# Altium PCB start.PcbDoc
Units mil, origin at the board's own origin, x right, y up, seen from the top; angles counter-clockwise.
Board outline 3650 x 1995 mil, 2 copper layers (Top Layer, Bottom Layer); 33 components, 43 nets, 203 pads, 0 vias.
Unrouted connection lines stored in the file: 2.
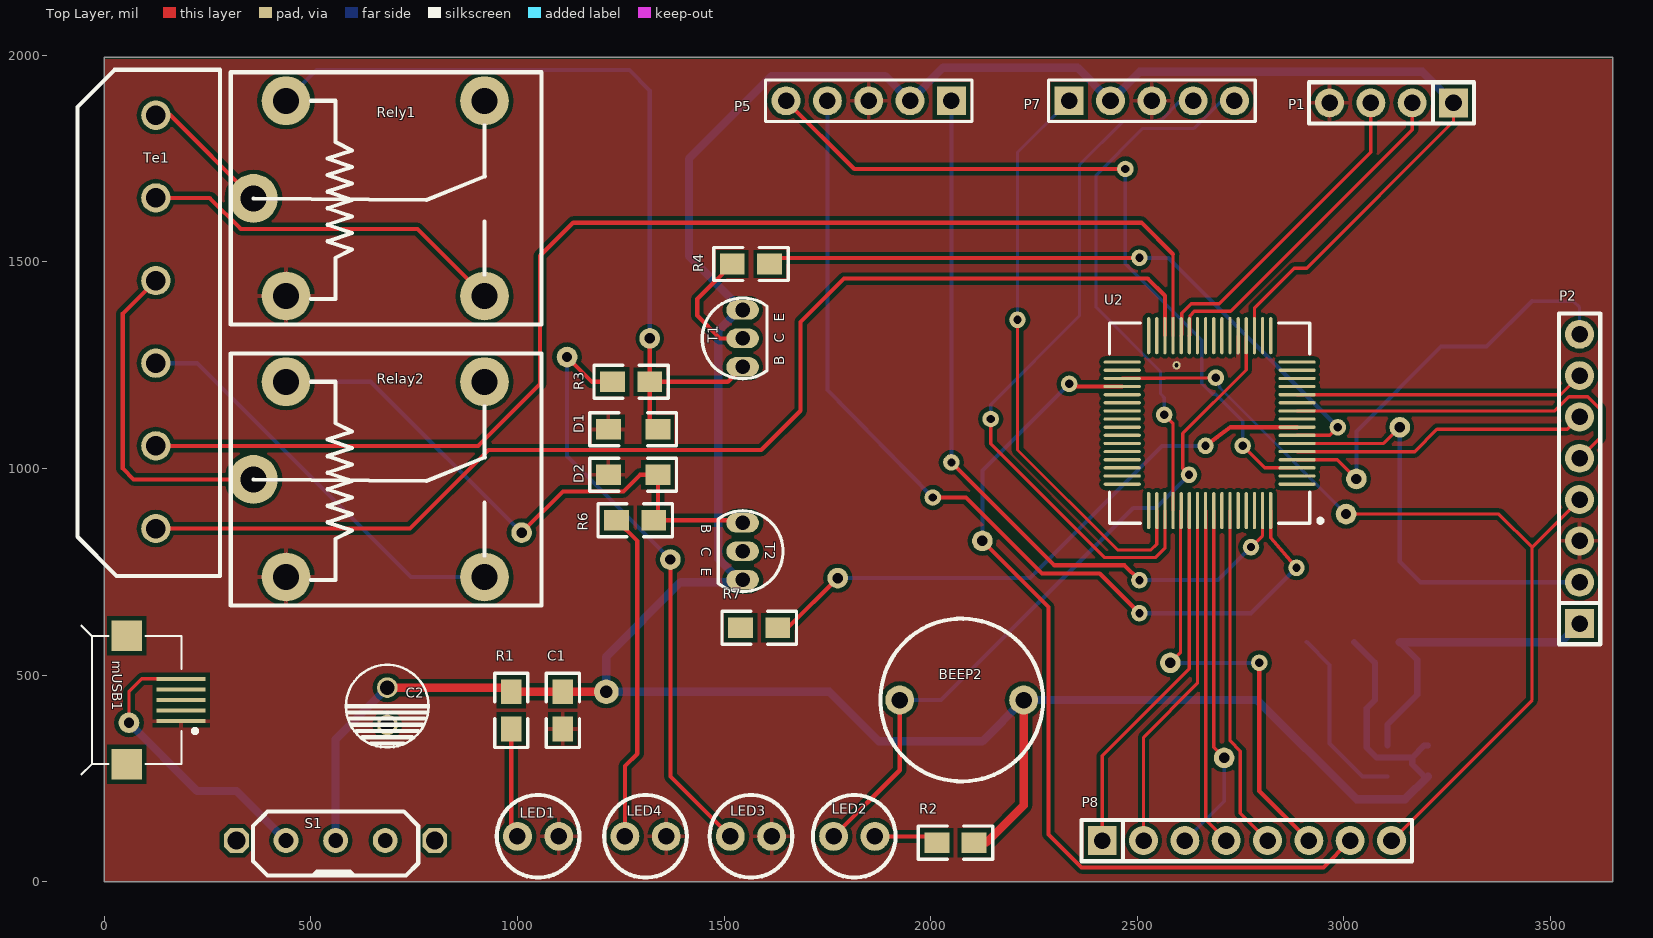
[diagram p0: Top Layer view]
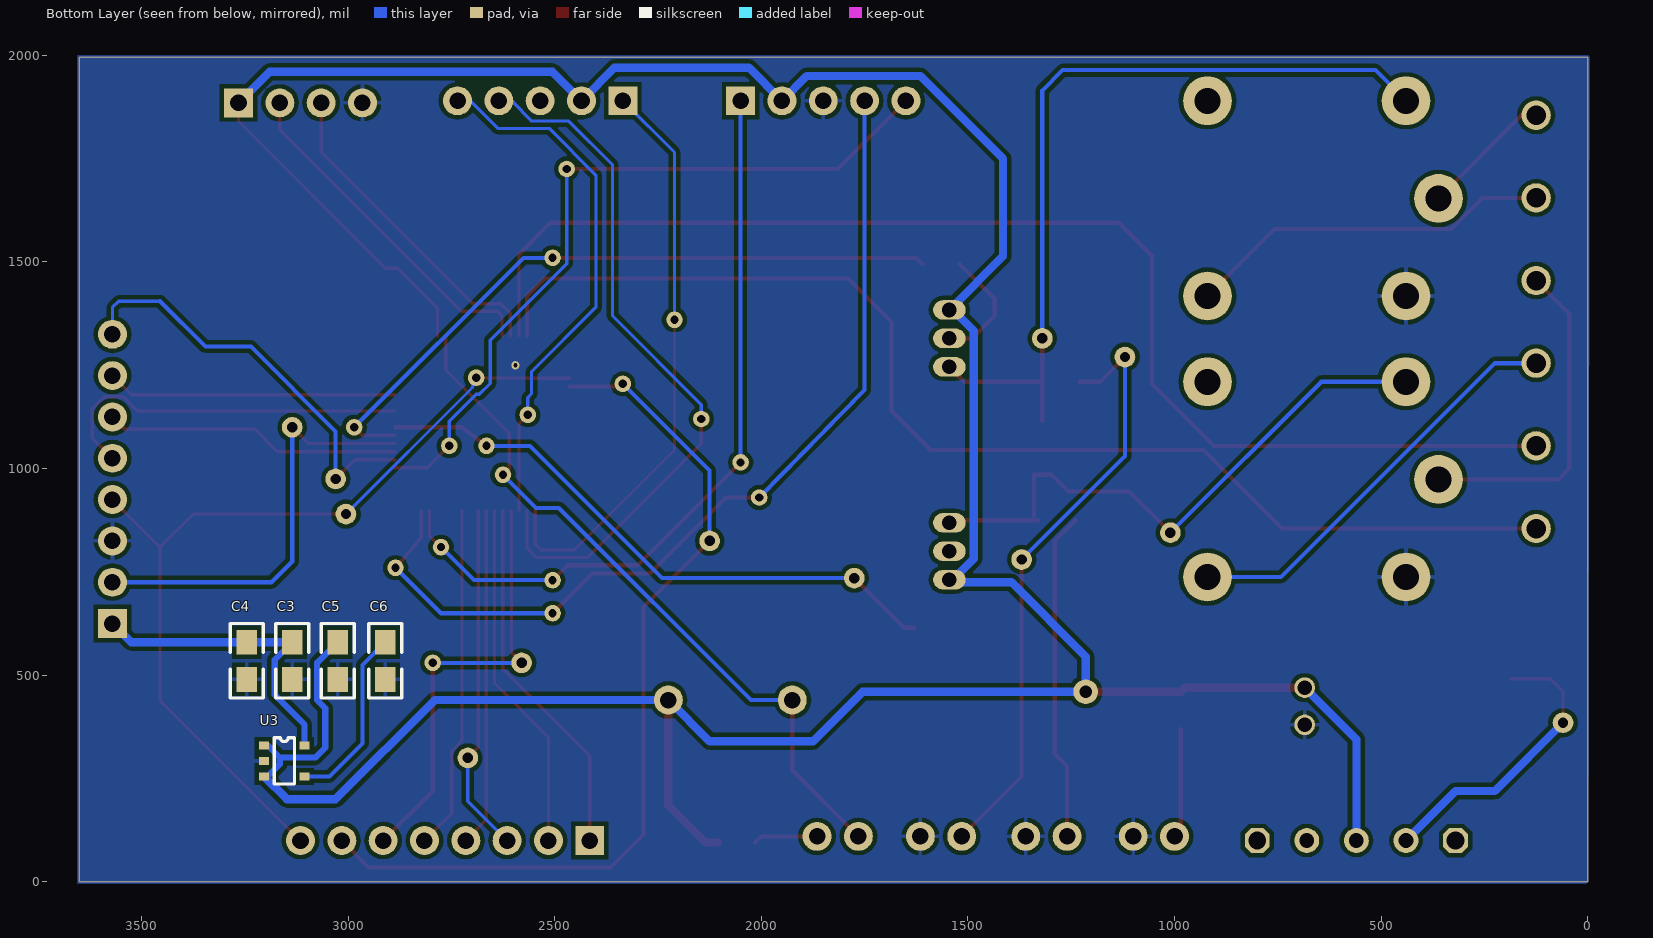
[diagram p1: Bottom Layer view, seen from below]

## Layer stack, top to bottom
Top Layer: signal copper 1.4
Dielectric: dielectric 12.6, FR-4, Dk 4.8
Bottom Layer: signal copper 1.4

## Board outline
0,0 3650,0 3650,1995 0,1995

## Design rules (kind name [scope] priority, off if disabled: settings)
Clearance [All] p1: gap=10
PolygonConnect [All] p1: connectstyle=Relief reliefconductorwidth=10 reliefentries=4 polygonreliefangle="90 Angle" airgapwidth=10
RoutingVias [All] p1: holewidth=28 width=50 viastyle="Through Hole" minholewidth=28 minwidth=50 maxholewidth=28 maxwidth=50
SolderMaskExpansion [All] p1: expansion=4
Width [All] p1: maxlimit=20 minlimit=6 preferedwidth=10
28 further rules are at their usual default settings.

## Components (designator, comment, footprint, x,y, rotation, side; value= is the part's Value field where it differs from the comment)
BEEP2 "BEEP" BEEP 2225,440 r180 top
C1 "104" CAP 1110,370 r90 top
C2 "10uF" capc 685,470 r0 top
C3 "105" CAP 3135,580 r270 bottom
C4 "104" CAP 3245,580 r270 bottom
C5 "105" CAP 3025,580 r270 bottom
C6 "223" CAP 2910,580 r270 bottom
D1 "D4148" D4148_1206 1220,1095 r0 top
D2 "D4148" D4148_1206 1220,985 r0 top
LED1 "LED_3mm" LED_3mm 1000,110 r0 top
LED2 "LED_3mm" LED_3mm 1865,110 r180 top
LED3 "LED_3mm" LED_3mm 1515,110 r0 top
LED4 "LED_3mm" LED_3mm 1260,110 r0 top
mUSB1 "mUSB" mUSB -30,440 r180 top
P1 "pin4" pin4 3115,1885 r180 top
P2 "pin8" pin8 3570,625 r90 top
P5 "pin5" pin5 2050,1890 r180 top
P7 "pin5" pin5 2335,1890 r0 top
P8 "pin8" pin8 2415,100 r0 top
R1 "200" res 985,460 r270 top
R2 "1k" res 2105,95 r180 top
R3 "4.7k" res 1230,1210 r0 top
R4 "100" res 1520,1495 r0 top
R6 "4.7k" res 1240,875 r0 top
R7 "100" res 1540,615 r0 top
Relay2 "继电器-Stop" 继电器-SRD 440,1210 r0 top
Rely1 "继电器-Start" 继电器-SRD 440,1890 r0 top
S1 "Horizontal_Switch" Horizontal_Switch 440,100 r0 top
T1 "8550" PNP 1545,1315 r0 top
T2 "8550" PNP 1545,800 r180 top
Te1 "Terminal_6P" Terminal_6P 125,1655 r270 top
U2 "STC8A8K64S4A12_LQFP64" STC8A8K64S4A12_LQFP64S 2675,1110 r180 top
U3 "RT9193-33" RT9193-33 3203.43,330 r180 bottom

## Footprints (in the part's own frame and the unit in brackets; to place one, negate y for a bottom-side part, rotate by r counter-clockwise, add the part's x,y. Pads: shape width x height; smd on the part's side, far side on the other; paste and mask are expansions set on the pad)
BEEP [mil]
  round 70 hole 40: 1(0,0) 2(300,0)
  silkscreen extent -47,-197 347,197
CAP [mil]
  rect 60x50 smd: 1(0,0) 2(90,0)
  silkscreen extent -45,-40 135,40
capc [mil]
  round 50 hole 35: 1(0,0) 2(0,-90)
  silkscreen extent -100,-145 100,55
D4148_1206 [mil]
  rect 60x50 smd: 1(0,0) 2(120,0)
  silkscreen extent -45,-40 165,40
Horizontal_Switch [mil]
  round 60 hole 35.43: 1(0,0) 2(120,0) 3(240,0)
  oct 60x60 hole 43.31: 4(-120,0) 5(360,0)
  silkscreen extent -80,-85 320,70
LED_3mm [mil]
  round 70 hole 40: 1(0,0) 2(100,0)
  silkscreen extent -50,-100 150,100
mUSB [mm]
  rect 3x0.25 smd: D+(-5.486,0) D-(-5.486,-0.65) GND(-5.486,1.3) ID(-5.486,0.65) VCC(-5.486,-1.3)
  rect 1.9x1.9 smd: ""(-2.15,3.95) ""(-2.15,-3.95)
  silkscreen extent -6.47,-4.57 0.63,4.57
pin4 [mil]
  rect 70x70 hole 40: 1(-150,0)
  round 70 hole 40: 2(-50,0) 3(50,0) 4(150,0)
  silkscreen extent -200,-50 200,50
pin5 [mil]
  rect 70x70 hole 40: 1(0,0)
  round 70 hole 40: 2(100,0) 3(200,0) 4(300,0) 5(400,0)
  silkscreen extent -50,-50 450,50
pin8 [mil]
  rect 70x70 hole 40: 1(0,0)
  round 70 hole 40: 2(100,0) 3(200,0) 4(300,0) 5(400,0) 6(500,0) 7(600,0) 8(700,0)
  silkscreen extent -50,-50 750,50
PNP [mm]
  oval 2x1.2 hole 0.9: 1(0,1.75) 2(0,0) 3(0,-1.75)
  silkscreen extent -2.48,-2.48 1.5,2.48, body extent -2.5,-2.5 1.5,2.5, height 7
res [mil]
  rect 60x50 smd: 1(0,0) 2(90,0)
  silkscreen extent -45,-40 135,40
RT9193-33 [mm]
  rect 0.6x0.5 smd: 1(0,0) 2(0,-0.95) 3(0,-1.9) 4(2.5,-1.9) 5(2.5,0)
  silkscreen extent 0.63,-2.38 1.87,0.48
STC8A8K64S4A12_LQFP64S [mm] "STC8A8K64S4A12_LQFP64S"
  oval 2.286x0.2 smd: 1(-5.375,3.75) 2(-5.375,3.25) 3(-5.375,2.75) 4(-5.375,2.25) 5(-5.375,1.75) 6(-5.375,1.25) 7(-5.375,0.75) 8(-5.375,0.25) 9(-5.375,-0.25) 10(-5.375,-0.75) 11(-5.375,-1.25) 12(-5.375,-1.75) 13(-5.375,-2.25) 14(-5.375,-2.75) 15(-5.375,-3.25) 16(-5.375,-3.75) 33(5.375,-3.75) 34(5.375,-3.25) 35(5.375,-2.75) 36(5.375,-2.25) 37(5.375,-1.75) 38(5.375,-1.25) 39(5.375,-0.75) 40(5.375,-0.25) 41(5.375,0.25) 42(5.375,0.75) 43(5.375,1.25) 44(5.375,1.75) 45(5.375,2.25) 46(5.375,2.75) 47(5.375,3.25) 48(5.375,3.75)
  oval 0.2x2.286 smd: 17(-3.75,-5.375) 18(-3.25,-5.375) 19(-2.75,-5.375) 20(-2.25,-5.375) 21(-1.75,-5.375) 22(-1.25,-5.375) 23(-0.75,-5.375) 24(-0.25,-5.375) 25(0.25,-5.375) 26(0.75,-5.375) 27(1.25,-5.375) 28(1.75,-5.375) 29(2.25,-5.375) 30(2.75,-5.375) 31(3.25,-5.375) 32(3.75,-5.375) 49(3.75,5.375) 50(3.25,5.375) 51(2.75,5.375) 52(2.25,5.375) 53(1.75,5.375) 54(1.25,5.375) 55(0.75,5.375) 56(0.25,5.375) 57(-0.25,5.375) 58(-0.75,5.375) 59(-1.25,5.375) 60(-1.75,5.375) 61(-2.25,5.375) 62(-2.75,5.375) 63(-3.25,5.375) 64(-3.75,5.375)
  silkscreen extent -6.93,-6.15 6.15,6.15, body extent -6,-6 6,6, height 1.6
Terminal_6P [mm]
  round 1.8 hole 1.2: 1(-5.08,0) 2(0,0) 3(5.08,0) 4(10.16,0) 5(15.24,0) 6(20.32,0)
  silkscreen extent -7.87,-4.83 23.24,3.94
继电器-SRD [mm]
  round 3 hole 1.6: 1(0,0) 2(0,-12) 3(-2,-6) 4(12.2,0) 5(12.2,-12)
  silkscreen extent -3.4,-13.75 15.7,1.75

## Part data
C1 C3 C4 C5 C6: library part CAP
C2: library part CAPC
D1 D2: library part D4148_1206
R1 R2 R3 R4 R6 R7: library part RES
Relay2 Rely1: library part 继电器-SRD
T1 T2: library part PNP

## Free pads (board coordinates)
  round 60 hole 30: 0(1215,460)
  round 50 hole 25: 2(60,385) 5(1120,1270) 6(1370,780) 7(1010,845) 8(1320,1315) 9(3135,1100) 10(3030,975) 11(3005,890) 17(1775,735) 18(2710,300) 19(2580,530) 24(2125,825)
  round 40 hole 20: 12(2690,1220) 15(2625,985) 16(2665,1055) 20(2795,530) 21(2885,760) 22(2775,810) 23(2565,1130) 25(2335,1205) 28(2210,1360) 29(2145,1120) 30(2985,1100) 31(2505,1510) 32(2755,1055) 33(2471,1725) 34(2050,1015) 35(2005,930) 36(2505,730) 37(2505,650)
  round 20 hole 10: 38(2595,1250)

## Nets (pads, with @x,y where several pads share a name; then routed paths per layer and width w, separated by ;. In a path a pad name is that pad's centre, name@x,y a point inside that pad or via, vN(x,y) a via of type N, cw(c..) or ccw(c..) an arc to the next point about the centre after c; other vN are vias at no path point)
GND: C1.1 C2.2 C3.2 C4.2 C5.2 C6.2 D1.1 D2.1 LED1.2 LED3.2 LED4.2 mUSB1.GND P1.4 P2.3 P5.3 P7.3 pad.38 Relay2.2 Rely1.2 U2.21 U3.2
KEY_START: Te1.5 U2.29 | length 3095.3
  Top Layer w8: U2.29 2586.42,1518.58
  Top Layer w10: Te1.5 905,1055 1055,1205 1055,1515 1135,1595 2510,1595 2586.42,1518.58
KEY_STOP: Te1.6 U2.30 | length 2932.2
  Top Layer w10: Te1.6 740,855 930,1045 1590,1045 1685,1140 1685,1355 1790,1460 2525,1460 2566.73,1418.27 U2.30
MISO: P2.5 U2.10 | length 899.1
  Top Layer w8: U2.10 3509.98,1139.53 3544.46,1174 3590.3,1174 3619,1145.3 3619,1074 P2.5
MOSI: P2.6 U2.5 | length 718.1
  Top Layer w8: U2.5 3171.1,1041.1 3225,1095 3540,1095 P2.6
NetC6_1: C6.1 U3.4 | length 440.8
  Bottom Layer w10: C6.1 2965,525 2965,335 3044.8,255.2 U3.4
NetD1_2: D1.2 pad.8 R3.2 Rely1.1 T1.3 | length 1970.9
  Top Layer w10: D1.2@1320,1115 R3.2 ; pad.8 R3.2 ; T1.3 1508.9,1210 R3.2
  Bottom Layer w10: Rely1.1 514.06,1964.06 1270.94,1964.06 1320,1915 pad.8
NetD2_2: D2.2 pad.7 R6.2 Relay2.1 T2.3 | length 1426.7
  Top Layer w10: pad.7 1110,945 1256.21,945 1296.21,985 D2.2 R6.2@1340,885 ; R6.2 1538.9,875 T2.3
  Bottom Layer w10: Relay2.1 645,1210 pad.7
NetLED1_1: LED1.1 R1.2 | length 266.2
  Top Layer w10: R1.2 985,125 LED1.1
NetLED2_1: LED2.1 R2.2 | length 156.2
  Top Layer w10: LED2.1 2000,110 R2.2
NetLED3_1: LED3.1 pad.5 pad.6 R3.1 | length 1458.5
  Top Layer w10: pad.5 1180,1210 R3.1 ; pad.6 1370,255 LED3.1
  Bottom Layer w10: pad.5 1120,1030 pad.6
NetLED4_1: LED4.1 R6.1 | length 798.1
  Top Layer w10: R6.1 1290,825 1290,310 1260,280 LED4.1
NetmUSB1_VCC: mUSB1.VCC pad.2 S1.1 | length 712
  Top Layer w8: pad.2 60,460 91.18,491.18 mUSB1.VCC
  Bottom Layer w20: pad.2 225,220 320,220 S1.1
NetR4_1: R4.1 T1.2 | length 293
  Top Layer w10: R4.1 1435,1410 1435,1370 1490,1315 T1.2
NetR7_1: R7.1 T2.2
NetRelay2_3: Relay2.3 Te1.3 | length 815.3
  Top Layer w10: Te1.3 45,1375 45,1000 71.22,973.78 Relay2.3
NetRelay2_5: Relay2.5 Te1.4 | length 1009.6
  Bottom Layer w10: Te1.4 225,1255 742.44,737.56 Relay2.5
NetRely1_3: Rely1.3 Te1.1 | length 319.6
  Top Layer w10: Te1.1 160.04,1855 Rely1.3
NetRely1_5: Rely1.5 Te1.2 | length 893.7
  Top Layer w10: Te1.2 255.31,1655 330.59,1579.72 758.15,1579.72 Rely1.5
P02: P8.6 pad.19 pad.20 U2.53 | length 1073.9
  Top Layer w8: pad.19 2604.35,554.35 2604.35,896.64 U2.53
  Top Layer w10: pad.20 2795,220 P8.6
  Bottom Layer w10: pad.19 pad.20
P03: P8.5 U2.59 | length 836
  Top Layer w8: U2.59 2724.21,340.94 2749,316.15 2749,166 P8.5
P36: P2.4 P8.8 pad.11 pad.12 U2.35 | length 2181.5
  Top Layer w8: U2.35 2566.73,1218.27 pad.12 ; pad.11 3375,890 3455,810 ; P8.8 3455,440 3455,810 ; P2.4 3455,810
  Bottom Layer w8: pad.12 2700,1195 pad.11
P37: P8.7 pad.24 pad.25 U2.36 | length 2171.4
  Top Layer w10: pad.24@2120,830 pad.24 2285,665 2285,115 2365,35 2950,35 P8.7 ; pad.25 2341.42,1198.58 U2.36
  Bottom Layer w10: pad.24 2125,995 pad.25
P74: P8.1 U2.54 | length 885.7
  Top Layer w8: P8.1 2415,305 2625.79,515.79 U2.54
P75: P8.2 U2.55 | length 852.4
  Top Layer w8: P8.2 2515,349.53 2645.47,480 U2.55
P76: P8.4 U2.56 | length 819
  Top Layer w8: U2.56 2665.16,149.84 P8.4
P77: P8.3 pad.18 U2.57 | length 848.2
  Top Layer w8: U2.57 2684.84,325.16 pad.18
  Bottom Layer w8: P8.3 2710,195 pad.18
RST: P2.2 pad.9 U2.6 | length 1045.3
  Top Layer w8: U2.6 3095.79,1060.79 pad.9
  Bottom Layer w10: pad.9 3135,775 3185,725 P2.2
RXD: P1.2 U2.27 | length 838
  Top Layer w8: U2.27 2627.54,1323.36 2627.54,1370.11 2638.04,1380.61 2725.61,1380.61 3165,1820 P1.2
RXD2: P5.4 pad.21 pad.35 pad.37 U2.64 | length 2271.4
  Top Layer w8: U2.64 2822.64,832.36 pad.21
  Top Layer w10: pad.35 pad.35@2015,940 ; pad.35@2015,930 2085.5,930 2269.5,746 2409,746 pad.37
  Bottom Layer w10: P5.4 1750,1190 pad.35 ; pad.37 2775,650 pad.21
RXD3: P7.4 pad.29 U2.51 | length 1739.6
  Top Layer w8: pad.29 2145,1060 2420,785 2545,785 2566.73,806.73 U2.51
  Bottom Layer w8: pad.29 2145,1155 2360,1370 2360,1735 2466,1841 2555.3,1841 2604.3,1890 P7.4
SCK: P2.7 U2.12 | length 702.5
  Top Layer w8: U2.12 3523.9,1178.9 P2.7
SDA: P2.8 pad.10 U2.4 | length 1019.5
  Top Layer w8: U2.4 2983.58,1021.42 pad.10
  Bottom Layer w8: pad.10@3029.92,975.08 pad.10 ; 3455,1405 3555,1405 3570,1390 P2.8
  Bottom Layer w10: pad.10@3029.92,975.08 3029.92,1090.08 3235,1295.15 3345.15,1295.15 3455,1405
SET1: P5.1 pad.22 pad.34 pad.36 U2.63 | length 1851.2
  Top Layer w8: pad.22 2802.95,837.95 U2.63
  Top Layer w10: pad.34 2299,766 2469,766 pad.36
  Bottom Layer w10: pad.34 P5.1 ; pad.36 2695,730 pad.22
SET2: P7.1 pad.28 U2.50 | length 1421.2
  Top Layer w8: pad.28 2210,1045 2452,803 2533,803 2547.05,817.05 U2.50
  Bottom Layer w8: pad.28 2210,1765 P7.1
START: pad.30 pad.31 R4.2 U2.7 | length 1657.5
  Top Layer w8: U2.7 2965.47,1080.47 pad.30
  Top Layer w10: R4.2 1625,1510 pad.31
  Bottom Layer w10: pad.31 2575,1510 pad.30
STATUS: BEEP2.2 LED2.2 pad.15 U2.20 | length 1728.5
  Top Layer w8: pad.15 2610,1000 2610,1085 2763.58,1238.58 U2.20
  Top Layer w10: LED2.2 1925,270 BEEP2.2
  Bottom Layer w10: BEEP2.2 2025,440 2490,905 2545,905 pad.15
STOP: pad.16 pad.17 R7.2 U2.8 | length 1453.9
  Top Layer w10: R7.2 1655,615 pad.17 ; pad.16 2725.16,1100.16 U2.8
  Bottom Layer w10: pad.17 2240,735 2560,1055 pad.16
TXD: P1.3 U2.28 | length 793.3
  Top Layer w8: U2.28 2607.79,1323.3 2607.79,1375.81 2630.59,1398.61 2698.61,1398.61 3065,1765 P1.3
TXD2: P5.5 pad.32 pad.33 U2.3 | length 1835.1
  Top Layer w8: pad.32 2808.27,1001.73 U2.3
  Top Layer w10: P5.5 1815,1725 pad.33
  Bottom Layer w8: pad.33 2471,1495.92 2656,1310.92 2656,1205.92 2681.92,1180 2689.54,1180 2755,1114.54 pad.32
TXD3: P7.5 pad.23 U2.52 | length 1298.4
  Top Layer w8: pad.23 2586.42,1108.58 U2.52
  Bottom Layer w8: pad.23 2565,1171.92 2556,1180.92 2556,1234 2400,1390 2400,1710 2513,1823 2637.3,1823 2704.3,1890 P7.5
VCC: BEEP2.1 C1.2 C2.1 C5.1 P1.1 P5.2 P7.2 pad.0 R1.1 R2.1 S1.2 T1.1 T2.1 U2.19 U3.1 U3.3 | length 8579.9
  Top Layer w8: U2.19 2783.27,1388.27 2880,1485 2910,1485 3265,1840 P1.1
  Top Layer w20: C2.1 975,470 R1.1 C1.2 pad.0 ; R2.1 2135,95 2225,185 BEEP2.1
  Bottom Layer w15: C5.1 3075,530 3075,440 3055,420 3055,325 3079.42,300.58 3165,300.58 ; U3.3 3194.42,255.2 3165,284.62 3165,300.58 ; U3.1 3194.42,330 3165,300.58
  Bottom Layer w20: S1.2 560,345 C2.1 ; U3.3 3148.23,200 3030,200 2790,440 BEEP2.1 2125,340 1875,340 1755,460 pad.0 1215,545 1395,725 1538.9,725 T2.1 1536.46,731.1 1485.63,781.93 1485.63,1333.07 1536.46,1383.9 T1.1 1415,1513.9 1415,1750 1615,1950 1890,1950 P5.2 2030,1970 2355,1970 P7.2 2505,1960 3190,1960 P1.1
VCC33: C3.1 C4.1 P2.1 U3.5 | length 751.3
  Bottom Layer w15: U3.5 3105,380.25 3177.5,452.75 3177.5,537.5 C3.1
  Bottom Layer w20: C3.1 C4.1 3525,580 P2.1
pads on no net: mUSB1. mUSB1.D+ mUSB1.D- mUSB1.ID Relay2.4 Rely1.4 S1.3 S1.4 S1.5 U2.1 U2.2 U2.9 U2.11 U2.13 U2.14 U2.15 U2.16 U2.17 U2.18 U2.22 U2.23 U2.24 U2.25 U2.26 U2.31 U2.32 U2.33 U2.34 U2.37 U2.38 U2.39 U2.40 U2.41 U2.42 U2.43 U2.44 U2.45 U2.46 U2.47 U2.48 U2.49 U2.58 U2.60 U2.61 U2.62

## Polygon pours and split planes (outlines as drawn)
GND on Top Layer "Top Layer-No Net" (solid, pour order 2): 0,0 3650,0 3650,1990 0,1990 0,0
GND on Bottom Layer "Top Layer-No Net" (solid, pour order 4): 0,0 5,-5 3655,-5 3655,2000 -5,2000

## Silkscreen, mask and mechanical layers (free items; w line width, h text height)
Mechanical 1:
  the board outline again, w10

## Text inside footprints (layer, text, board x,y; h text height)
T1: Top Overlay "B" at 1645,1250 h23.62 r90; Top Overlay "C" at 1645,1305 h23.62 r90; Top Overlay "E" at 1645,1355 h23.62 r90
T2: Top Overlay "B" at 1445,865 h23.62 r270; Top Overlay "C" at 1445,810 h23.62 r270; Top Overlay "E" at 1445,760 h23.62 r270